# EAGLE board LPC82X_TSSOP_breadboard_mini (EAGLE 7.1.0)
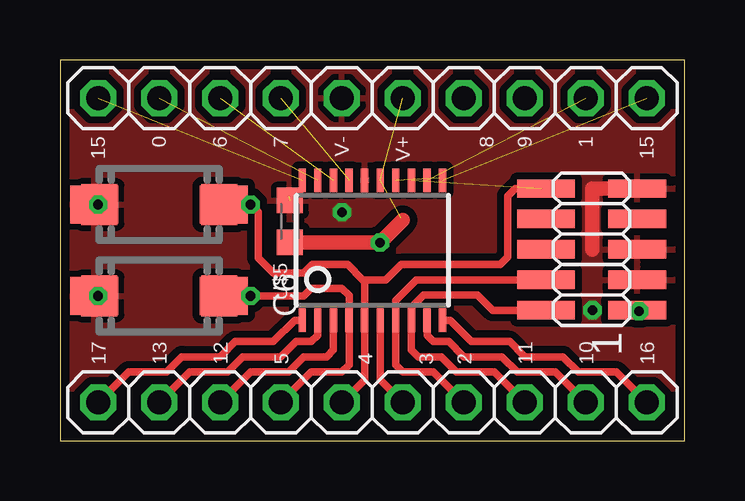
[diagram p0: board, top side]
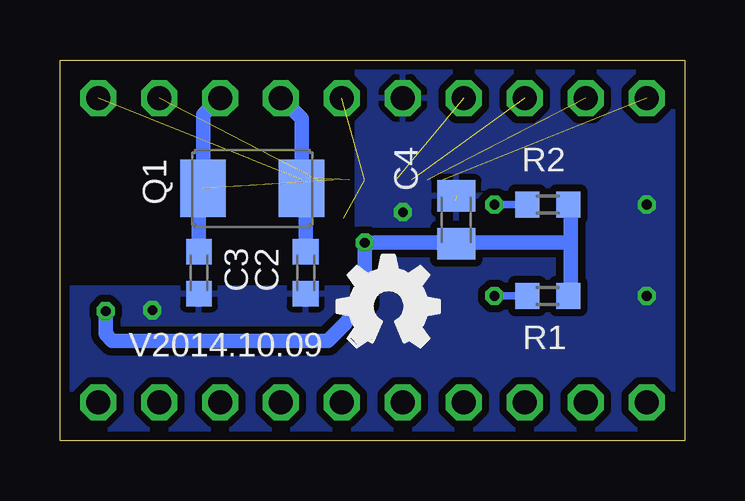
[diagram p1: board, bottom side, seen from below]

Size 26.04 x 15.88 mm. Coordinates in mm from the lower left corner, seen from the top.
Outline: 26.04,0 26.04,15.88 0,15.88 0,0 26.04,0
Copper layers (1*16): Top 0.0356mm / dielectric 1.5011mm / Bottom 0.0356mm
Design rules "OSHPark": minimum track width 6mil, minimum drill 13mil, track to track 6mil, track to pad 6mil, pad to pad 6mil, via to via 6mil, smd to smd 6mil, copper to edge 15mil, drill to drill 6mil, minimum pad ring 7mil, minimum via ring 7mil, stop-mask expansion 3mil, vias tented up to drill 0mil, thermal gap 10mil

## Footprints (pad centres in the part's own frame; a part is rotated, then mirrored left to right if it is on the bottom)
C0603K = smd 1.05 x 1.08: 1 -0.875,0; 2 0.875,0
C0805K = smd 1.3 x 1.6: 1 -1,0; 2 1,0
1X10_NORMAL_OCT = drill 1 octagon: 1 -11.43,0; 2 -8.89,0; 3 -6.35,0; 4 -3.81,0; 5 -1.27,0; 6 1.27,0; 7 3.81,0; 8 6.35,0; 9 8.89,0; 10 11.43,0
2X05_1.27_SMD = smd 0.76 x 2.4: 1 -2.54,-1.905; 2 -2.54,1.905; 3 -1.27,-1.905; 4 -1.27,1.905; 5 0,-1.905; 6 0,1.905; 7 1.27,-1.905; 8 1.27,1.905; 9 2.54,-1.905; 10 2.54,1.905
CRYSTAL_5.0X3.2 = smd 1.9 x 2.4: 1 -2.05,0; 2 2.05,0
R0603 = smd 1 x 1.1: 1 -0.85,0; 2 0.85,0
DTSM3 = smd 2 x 1.6: P$1 -2.7,0; P$2 2.7,0
TD-85XU = smd 1.5 x 1.7: P$1 -2.5,0; P$2 2.5,0
TSSOP20 = smd 0.305 x 0.991: 1 -2.925,-2.918; 2 -2.275,-2.918; 3 -1.625,-2.918; 4 -0.975,-2.918; 5 -0.325,-2.918; 6 0.325,-2.918; 7 0.975,-2.918; 8 1.625,-2.918; 9 2.275,-2.918; 10 2.925,-2.918; 11 2.925,2.918; 12 2.275,2.918; 13 1.625,2.918; 14 0.975,2.918; 15 0.325,2.918; 16 -0.325,2.918; 17 -0.975,2.918; 18 -1.625,2.918; 19 -2.275,2.918; 20 -2.925,2.918

## Placement (x,y rotation side)
C2  22p  [C0603K]  15.8,7 270 bottom
C3  22p  [C0603K]  20.24,7 270 bottom
C4  1u  [C0805K]  9.53,9.21 90 bottom
C6  100n  [C0603K]  9.58,9.14 90 top
JP1  [1X10_NORMAL_OCT]  13.02,1.59 0 top
JP2  [1X10_NORMAL_OCT]  13.02,14.29 180 top
JP3  JTAG  [2X05_1.27_SMD]  22.15,7.98 90 top
LOGO2  OSHW_LOGO_FILLX0150-NT  [OSHW_FILLX150_NOTEXT]  14.48,3.91 0 bottom
Q1  12MHz  [CRYSTAL_5.0X3.2]  18.02,10.52 180 bottom
R1  10k  [R0603]  5.71,6.03 180 bottom
R2  10k  [R0603]  5.71,9.84 180 bottom
U$1  TACT_2PINDTSM3  [DTSM3]  4.13,9.84 180 top
U$2  TACT_2PINDTSM3  [DTSM3]  4.13,6.03 180 top
U$3  TACT_2PIN  [TD-85XU]  4.13,9.84 180 top
U$4  TACT_2PIN  [TD-85XU]  4.13,6.03 180 top
U$5  LPC82XM101JDH20  [TSSOP20]  13.02,7.94 0 top

## Library data of the parts
C2 C3 C6 = SquantorRCL
C4 R1 R2 = bart_rcl
JP1-JP3 = SquantorConnectors
LOGO2 = ohw-logo
Q1 = bart_crystals
U$1-U$4 = SquantorButtons
U$5 = LPC800

## Nets
PIO0_0: JP2.9 U$5.19
PIO0_1: JP2.2 U$5.12
PIO0_2: JP1.8 JP3.2 U$5.8
PIO0_3: JP1.7 JP3.4 U$5.7
PIO0_4: JP1.6 U$5.6
PIO0_5: JP1.5 JP3.10 R2.2 U$1.P$1 U$3.P$1 U$5.5
PIO0_8: C2.1 JP2.4 Q1.1 U$5.14
PIO0_9: C3.1 JP2.3 Q1.2 U$5.13
PIO0_10: JP1.10 U$5.10
PIO0_11: JP1.9 U$5.9
PIO0_12: JP1.4 R1.2 U$2.P$1 U$4.P$1 U$5.4
PIO0_13: JP1.3 U$5.3
PIO0_14: JP2.10 U$5.20
PIO0_15: JP2.1 U$5.11
PIO0_17: JP1.2 U$5.2
PIO0_23: JP1.1 U$5.1
VDD: C4.1 C6.1 JP2.5 JP3.1 R1.1 R2.1 U$5.15
VREF_P: JP2.8 U$5.18
VREFN: JP2.7 U$5.17
VSS: C2.2 C3.2 C4.2 C6.2 JP2.6 JP3.3 JP3.5 JP3.9 U$1.P$2 U$2.P$2 U$3.P$2 U$4.P$2 U$5.16

## Tracks (layer width: path | path; a pad name or v marks a point on that pad's centre or on a via)
PIO0_0  (1 unrouted)
PIO0_1  (1 unrouted)
PIO0_2
  Top 0.305: JP3.2 18.02,5.44 17.39,6.07 15.16,6.07 14.64,5.55 U$5.8 14.64,3.77 14.92,3.49 15.88,3.49 16.51,2.86 18.1,2.86 JP1.8
PIO0_3
  Top 0.305: JP3.4 14.85,6.71 13.99,5.85 U$5.7 13.99,3.15 14.29,2.86 15.56,2.86 JP1.7
PIO0_4
  Top 0.305: JP1.6 13.34,2.53 U$5.6
PIO0_5  (via drill 0.4)
  Top 0.305: JP3.10 18.97,10.52 18.66,10.2 18.66,7.66 18.34,7.34 14.21,7.34 13.58,6.71 12.69,6.71 | 12.69,6.71 12.62,6.71 11.99,7.34 10.52,7.34 10.16,6.99 8.89,6.99 8.26,7.62 8.26,9.53 v7.94,9.84 U$1.P$1 | 12.69,6.71 U$5.5 12.69,2.53 JP1.5
  Top 0.406: U$3.P$1 U$1.P$1
  Bottom 0.305: R2.2 v7.94,9.84
PIO0_8  (1 unrouted)
  Bottom 0.61: C2.1 15.8,10.98 Q1.1 15.97,13.43 JP2.4
PIO0_9  (1 unrouted)
  Bottom 0.61: C3.1 20.24,10.98 Q1.2 20.07,13.58 JP2.3
PIO0_10
  Top 0.305: JP1.10 23.18,2.86 21.59,2.86 20.95,3.49 19.37,3.49 18.73,4.13 17.14,4.13 16.25,5.02 U$5.10
PIO0_11
  Top 0.305: JP1.9 20.64,2.86 19.05,2.86 18.41,3.49 16.83,3.49 16.19,4.13 15.56,4.13 15.29,4.39 U$5.9
PIO0_12  (via drill 0.4)
  Top 0.305: U$2.P$1 v7.94,6.03 10.16,6.03 10.48,6.35 11.75,6.35 12.04,6.05 U$5.4 12.04,3.15 11.75,2.86 10.48,2.86 JP1.4
  Top 0.406: U$4.P$1 U$2.P$1
  Bottom 0.305: R1.2 v7.94,6.03
PIO0_13
  Top 0.305: JP1.3 7.94,2.86 9.53,2.86 10.16,3.49 11.11,3.49 11.39,3.77 U$5.3
PIO0_14  (1 unrouted)
PIO0_15  (1 unrouted)
PIO0_17
  Top 0.305: JP1.2 5.4,2.86 6.99,2.86 7.62,3.49 9.21,3.49 9.84,4.13 10.48,4.13 10.74,4.39 U$5.2
PIO0_23
  Top 0.305: JP1.1 2.86,2.86 4.45,2.86 5.08,3.49 6.67,3.49 7.3,4.13 8.89,4.13 9.78,5.02 U$5.1
VDD  (via drill 0.4)  (2 unrouted)
  Top 0.305: 14.22,9.28 14.29,9.21
  Top 0.61: 14.29,9.21 v13.34,8.26 10.16,8.26 10.15,8.27 C6.1 | v24.13,5.4 24.09,5.4 JP3.1
  Bottom 0.61: 10.16,8.26 v13.34,8.26 13.34,5.71 14.88,4.17 23.85,4.17 24.13,4.45 v24.13,5.4 | 10.16,8.26 4.76,8.26 | 4.76,8.26 4.76,9.74 R2.1 | 4.76,8.26 4.76,6.13 R1.1 | C4.1 10.11,8.21 10.16,8.26
VREF_P  (1 unrouted)
VREFN  (1 unrouted)
VSS  (via drill 0.4)  (1 unrouted)
  Top 0.61: JP3.9 22.19,10.52 22.19,7.98
  other vias: 22.19,5.44 11.75,9.53 1.59,9.84 1.59,6.03
  pour Top (isolate 0.305): 0,15.88 26.04,15.88 26.04,0 0,0
  pour Bottom (isolate 0.305): 0,15.88 13.65,15.88 13.65,6.35 26,6.35 26.04,0 0,0

## Text on the board
bPlace: V2014.10.09
tNames: 15 | 0 | 6 | 7 | V- | V+ | 8 | 9 | 1 | 15 | 17 | 13 | 12 | 5 | 4 | 3 | 2 | 11 | 10 | 16